# Altium PCB EasyPIC16F1455.PcbDoc
Units mm, origin at the board's own origin, x right, y up, seen from the top; angles counter-clockwise.
Board outline 38.73 x 27.56 mm, 2 copper layers (Top Layer, Bottom Layer); 20 components, 26 nets, 82 pads, 12 vias.
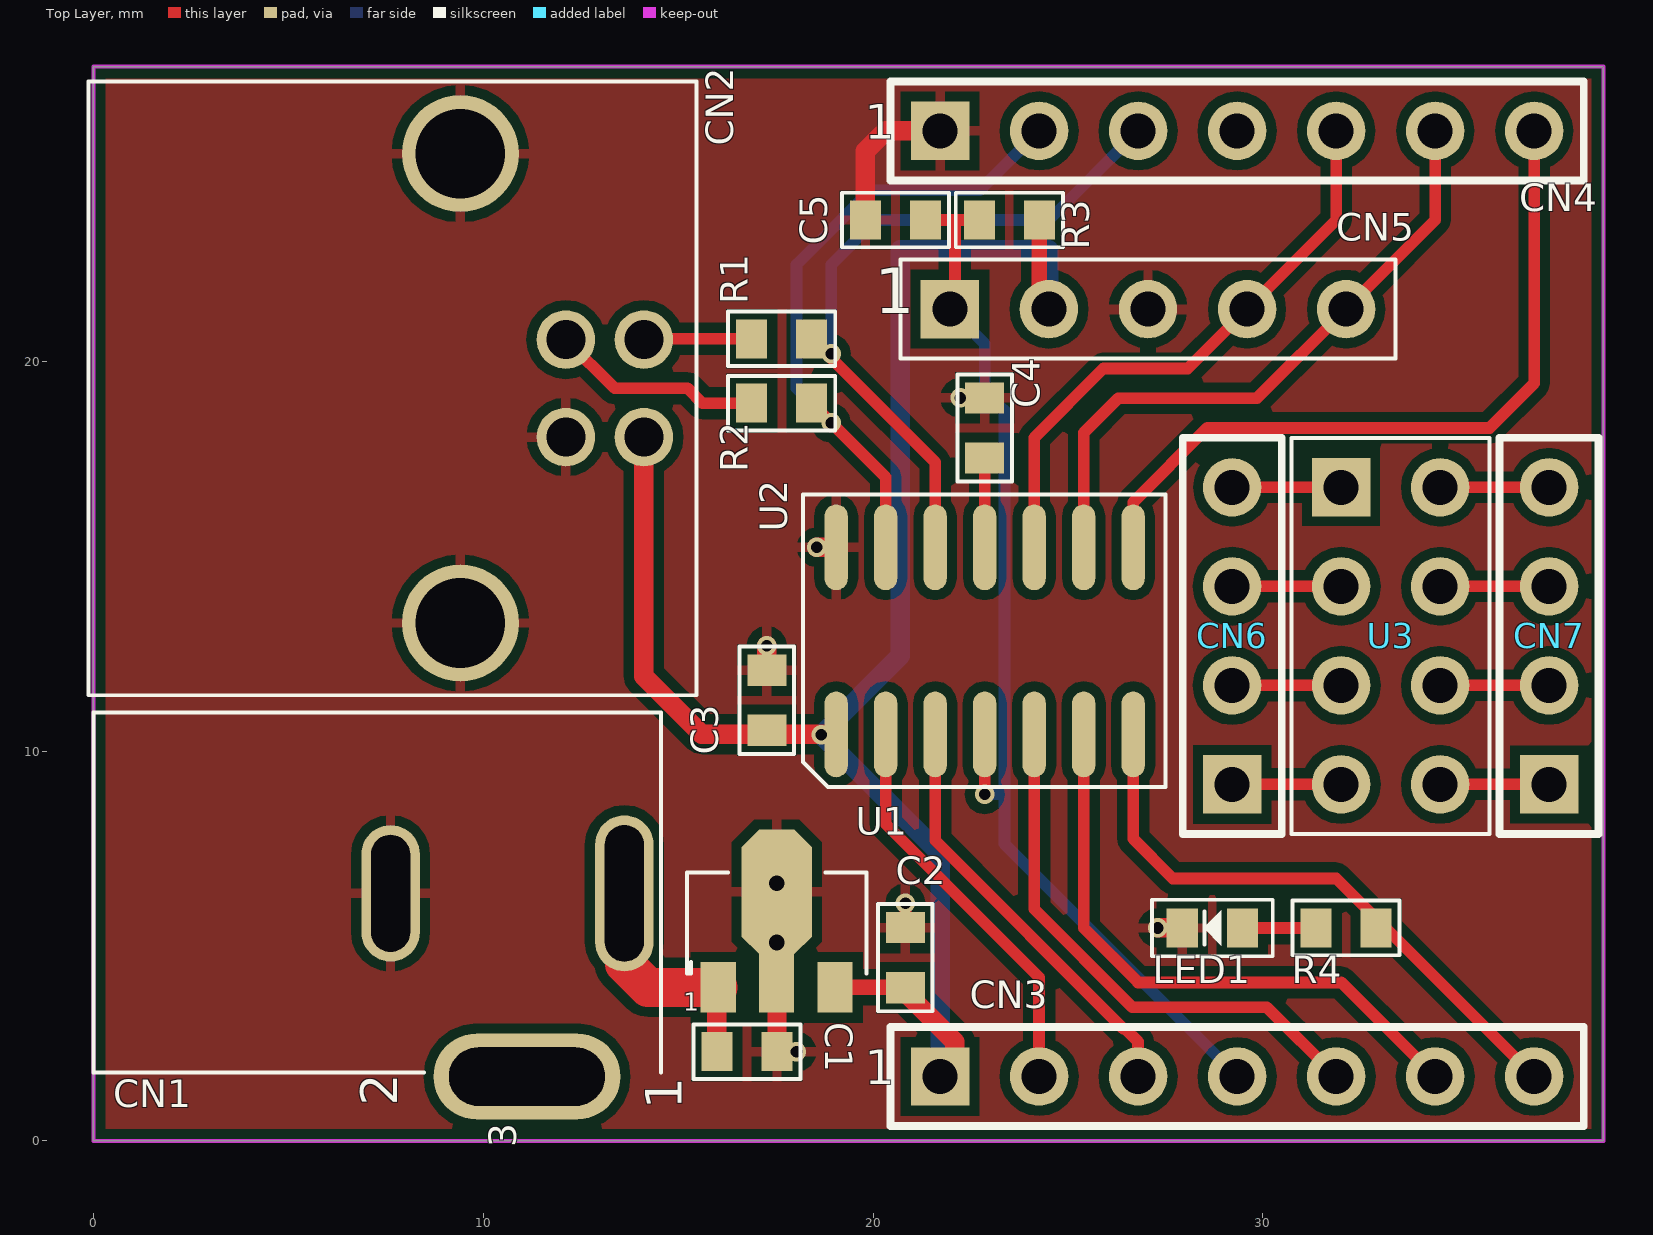
[diagram p0: Top Layer view]
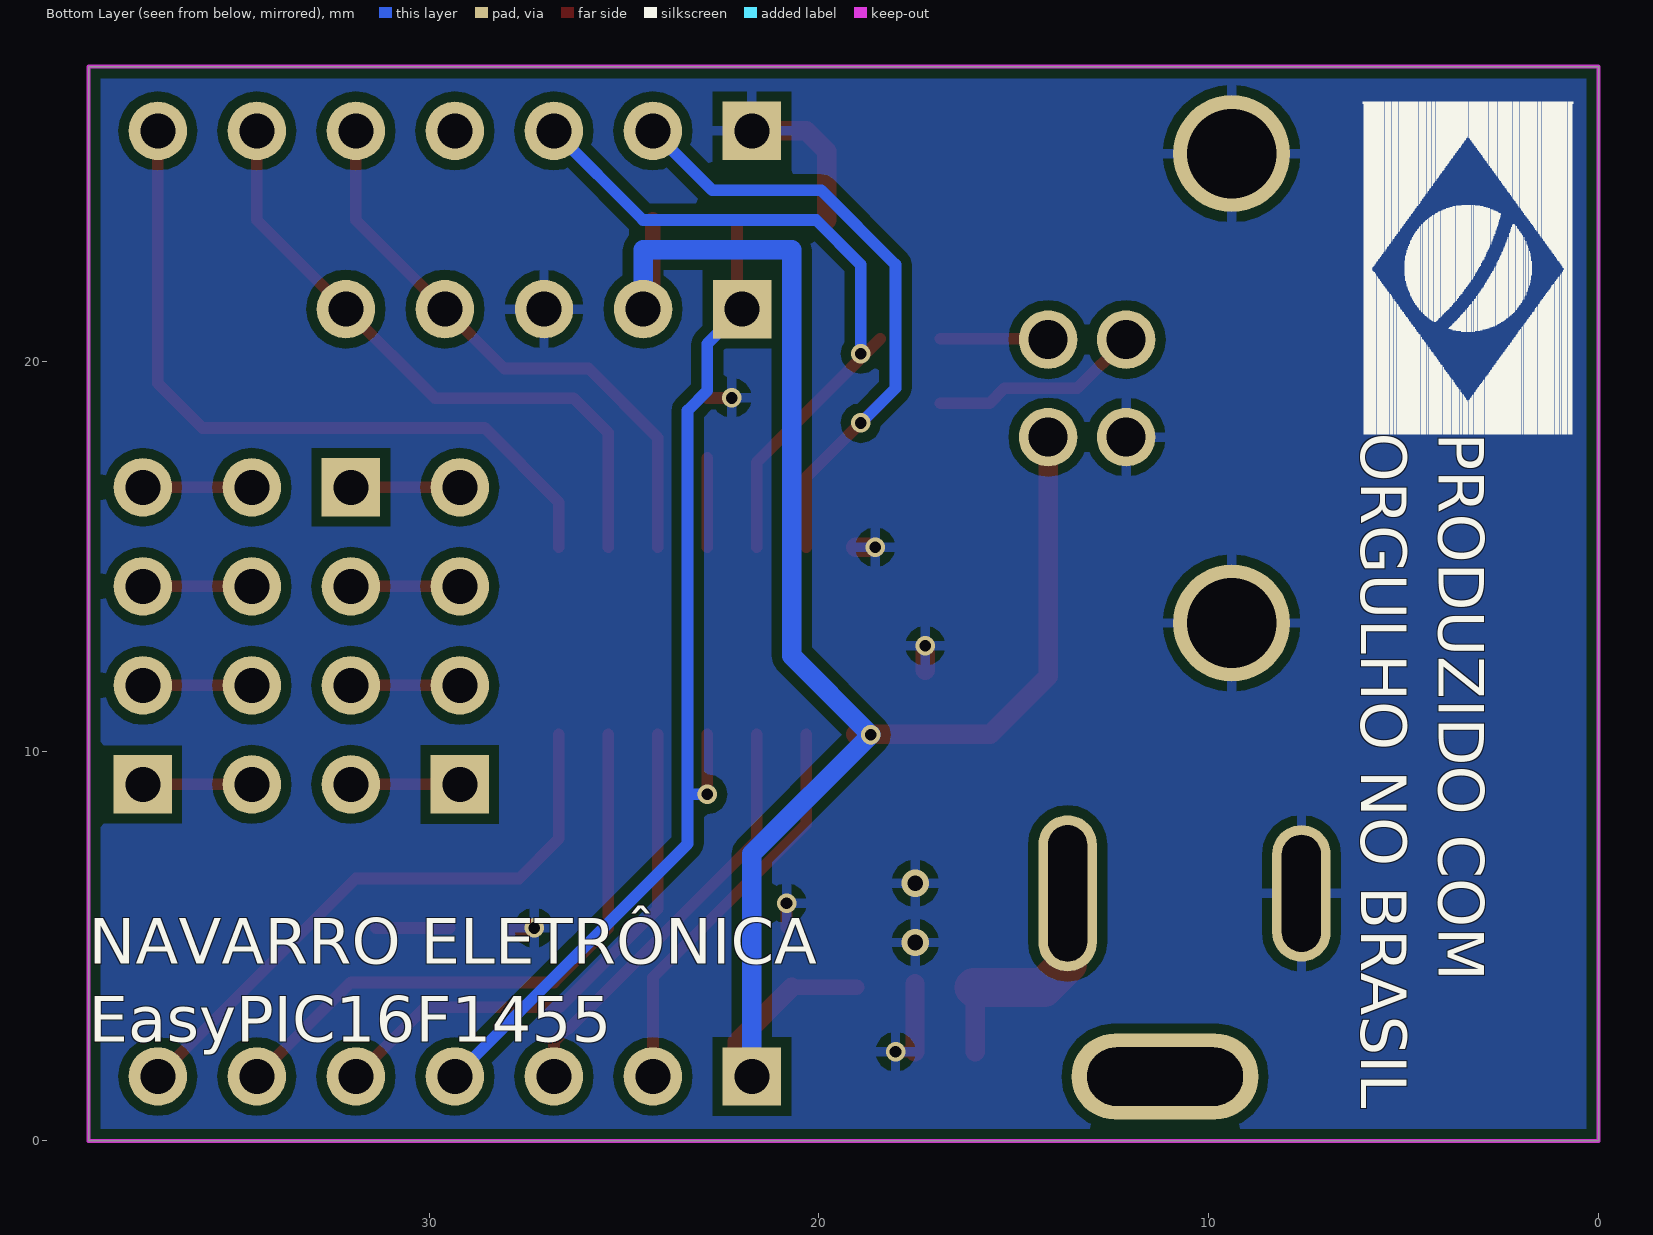
[diagram p1: Bottom Layer view, seen from below]

## Layer stack, top to bottom
Top Solder: solder mask 0.0102, Solder Resist, Dk 3.5
Top Layer: signal copper 0.0356
Dielectric 1: dielectric 0.32, FR-4, Dk 4.8
Bottom Layer: signal copper 0.0356
Bottom Solder: solder mask 0.0102, Solder Resist, Dk 3.5

## Board outline
0,0 0,27.559 38.735,27.559 38.735,0

## Design rules (kind name [scope] priority, off if disabled: settings)
Clearance [All] p1: gap=0.254
PolygonConnect [All] p1: connectstyle=Relief reliefconductorwidth=0.254 reliefentries=4 polygonreliefangle="90 Angle" airgapwidth=0.254
RoomDefinition EasyPIC16F1455 [InComponentClass('EasyPIC16F1455')] p1: confinementstyle=ConfineIn formatcopy=TRUE lockcomponents=FALSE outline -28.702,-32.385 22.098,-32.385 22.098,-6.985 -28.702,-6.985
RoutingVias [All] p1: holewidth=0.711 width=1.27 viastyle="Through Hole" minholewidth=0.711 minwidth=1.27 maxholewidth=0.711 maxwidth=1.27
SolderMaskExpansion [All] p1: expansion=0.102
Width [All] p1: maxlimit=10 minlimit=0.254 preferedwidth=0.254 minimp=50.000000 maximp=50.000000 favimp=50.000000
30 further rules are at their usual default settings.

## Components (designator, comment, footprint, x,y, rotation, side; value= is the part's Value field where it differs from the comment)
C1 "Capacitor Cerâmico" CC0603 16.764,2.286 r180 top
C2 "Capacitor Cerâmico" CC0603 20.828,4.699 r270 top
C3 "Capacitor Cerâmico" CC0603 17.272,11.303 r270 top
C4 "Capacitor Cerâmico" CC0603 22.86,18.288 r270 top
C5 "Capacitor Cerâmico" CC0603 20.574,23.622 r0 top
CN1 "Jack-3Pol" CONN_JACK-FONTE_3N 7.62,6.35 r90 top
CN2 "USB B" CONN_USB-B_RCPT-H 6.985,19.304 r270 top
CN3 "Header 7" "CONN HDR1X7" 21.717,1.651 r0 top
CN4 "Header 7" "CONN HDR1X7" 21.717,25.908 r0 top
CN5 "ICS" "CONN HDR1X5" 21.971,21.336 r0 top
CN6 "Header 4" "CONN HDR1X4" 29.21,9.144 r90 top
CN7 "Header 4" "CONN HDR1X4" 37.338,9.144 r90 top
LED1 "LED" "LED 0603" 28.702,5.461 r180 top
R1 "Resistor" CC0603 17.653,20.574 r180 top
R2 "Resistor" CC0603 17.653,18.923 r180 top
R3 "Resistor" CC0603 23.495,23.622 r0 top
R4 "Resistor" CC0603 32.131,5.461 r180 top
U1 "MC78L05A" SOT-89-3N 17.526,5.588 r90 top
U2 "PIC16F1455" SOIC-14N 22.86,12.827 r90 top
U3 "Rádio Chinês" MOD_NRF24L01 32.004,16.764 r0 top

## Footprints (in the part's own frame and the unit in brackets; to place one, negate y for a bottom-side part, rotate by r counter-clockwise, add the part's x,y. Pads: shape width x height; smd on the part's side, far side on the other; paste and mask are expansions set on the pad)
CC0603 [mm] "Chip Resistor, 2-Leads, Body 1,6x0,8mm, IPC Medium Density"
  rect 0.8x1 smd: 1(-0.77,0) 2(0.77,0)
  silkscreen extent -1.38,-0.7 1.38,0.7, body extent -0.8,-0.42 0.8,0.43, height 0.45
"CONN HDR1X4" [mm] "Connector; Header; 4 Position"
  rect 1.5x1.5 hole 0.9: 1(0,0)
  round 1.5 hole 0.9: 2(2.54,0) 3(5.08,0) 4(7.62,0)
  silkscreen extent -1.27,-1.27 8.89,1.27
"CONN HDR1X5" [mm] "Connector; Header; 5 Position, Pitch 2.54mm"
  rect 1.5x1.5 hole 0.9: 1(0,0)
  round 1.5 hole 0.9: 2(2.54,0) 3(5.08,0) 4(7.62,0) 5(10.16,0)
  silkscreen extent -1.27,-1.27 11.43,1.27, body extent -1.27,-1.27 11.43,1.27, height 8.51
"CONN HDR1X7" [mm] "Connector; Header; 7 Position"
  rect 1.5x1.5 hole 0.9: 1(0,0)
  round 1.5 hole 0.9: 2(2.54,0) 3(5.08,0) 4(7.62,0) 5(10.16,0) 6(12.7,0) 7(15.24,0)
  silkscreen extent -1.27,-1.27 16.51,1.27, body extent -1.27,-1.27 16.51,1.27, height 8.51
CONN_JACK-FONTE_3N [mm]
  oval 4x1.5 hole 1 slot 3.5 at 0 deg: 1(0,-6)
  oval 3.5x1.5 hole 1 slot 3 at 0 deg: 2(0,0)
  oval 2.2x4.8 hole 1.5 slot 4 at 90 deg: 3(-4.7,-3.5)
  silkscreen extent -4.59,-6.94 4.64,7.62, body extent -4.5,-6 4.5,7.73, height 11
CONN_USB-B_RCPT-H [mm] "Conector USB SMD tipo B, Macho"
  round 1.5 hole 1: 1(1.25,7.135) 2(-1.25,7.135) 3(-1.25,5.135) 4(1.25,5.135)
  round 3 hole 2.3: 5(6.02,2.425) 6(-6.02,2.425)
  silkscreen extent -7.87,-7.11 7.87,8.49, body extent -7.45,-7.96 7.35,8.54, height 11
"LED 0603" [mm] "Chip Diode, 2-Leads, Body 1,6x0,8mm, IPC Medium Density"
  rect 0.8x1 smd: 1(-0.77,0) 2(0.77,0)
  silkscreen extent -1.55,-0.73 1.55,0.73, body extent -0.82,-0.43 0.82,0.43, height 0.8
MOD_NRF24L01 [mm] "Radio Chines"
  rect 1.5x1.5 hole 0.9: 1(0,0)
  round 1.5 hole 0.9: 2(2.54,0) 3(0,-2.54) 4(2.54,-2.54) 5(0,-5.08) 6(2.54,-5.08) 7(0,-7.62) 8(2.54,-7.62)
  silkscreen extent -1.27,-8.89 3.81,1.27, body extent -1.77,-13.55 27.23,1.45, height 15.5
SOIC-14N [mm] "SOIC, 14-Leads, Body 8.7x3.9mm, Pitch 1.27mm, IPC Medium Density"
  oval 2.2x0.6 smd: 1(-2.4,3.81) 2(-2.4,2.54) 3(-2.4,1.27) 4(-2.4,0) 5(-2.4,-1.27) 6(-2.4,-2.54) 7(-2.4,-3.81) 8(2.4,-3.81) 9(2.4,-2.54) 10(2.4,-1.27) 11(2.4,0) 12(2.4,1.27) 13(2.4,2.54) 14(2.4,3.81)
  silkscreen extent -3.75,-4.64 3.75,4.65, body extent -2.9,-4.28 2.9,4.27, height 1.75
SOT-89-3N [mm] "SOT89, 3-Leads, Body 4,5x2,4mm (max), Pitch 1,50mm, Lead Span 4,1mm, IPC High Density"
  rect 1.3x0.9 smd: 1(-1.65,1.5) 3(-1.65,-1.5)
  rect 1.5x0.9 smd: 2(-1.55,0)
  oct 3.2x1.8 smd: 2(0.8,0)
  silkscreen extent -1.3,-2.3 1.3,2.3, body extent -2.18,-2.25 1.75,2.25, height 1.4

## Part data
C1 C2 C3 C5: library part "Cap 100nF 50V 0603 X7R", "Capacitor (Semiconductor SIM Model)"
C4: library part "Cap 1uF 50V 0603 X5R", "Capacitor (Semiconductor SIM Model)"
CN1: "Jack Socket, Thru-Hole, Vertical, 2 Conductors, 3 Contacts Single Switch, Normally Closed"
CN2: library part "USB B RCPT-H", "Conector Jack USB B, Through Hole, Right Angle, Horizontal"
CN3 CN4: "Header, 7-Pin"
CN5: library part "Header 5 ICS", "Header, 5-Pin"
CN6 CN7: "Header, 4-Pin"
R1 R2: library part "Res 33R 1% 0603 1/10W"
R3: library part "Res 10K 1% 0603 1/10W"
R4: library part "Res 1K 1% 0603 1/10W"
U1: library part MC78L05, "Regulador Linear 5V"
U2: "Microcontrolador PIC"
U3: library part "Modulo RF NRF24L01", "Módulo de rádio com nRF24L01"

## Via types
v1: diameter 0.5, hole 0.3, Top Layer to Bottom Layer, tented both sides, 10 vias
v2: diameter 0.7, hole 0.4, Top Layer to Bottom Layer, tented both sides, 2 vias

## Nets (pads, with @x,y where several pads share a name; then routed paths per layer and width w, separated by ;. In a path a pad name is that pad's centre, name@x,y a point inside that pad or via, vN(x,y) a via of type N, cw(c..) or ccw(c..) an arc to the next point about the centre after c; other vN are vias at no path point)
5V: C2.2 C3.2 CN2.1 CN3.1 CN5.2 R3.2 U1.3 U2.1 | length 47.4
  Top Layer w0.4: U1.3 C2.2@20.7,3.938 ; R3.2 24.265,21.582 CN5.2
  Top Layer w0.5: CN2.1 14.12,11.915 15.608,10.427 U2.1 ; C2.2@20.7,3.938 22.098,2.54 22.098,2.032 CN3.1
  Bottom Layer w0.5: CN3.1 21.717,7.366 v1(18.669,10.414) 20.701,12.446 20.701,22.86 24.511,22.86 CN5.2
12V: C1.2 CN1.1 U1.1 | length 6.1
  Top Layer w0.5: C1.2 U1.1@15.994,3.906
  Top Layer w1: CN1.1 13.62,4.541 14.223,3.938 U1.1
D+: CN4.2 R2.1 U2.13 | length 16.6
  Top Layer w0.3: R2.1 20.32,17.026 U2.13
  Bottom Layer w0.3: v1(18.923,18.415) 18.034,19.304 18.034,22.479 19.939,24.384 22.733,24.384 CN4.2
D-: CN4.3 R1.1 U2.12 | length 18.2
  Top Layer w0.3: R1.1 21.59,17.407 U2.12
  Bottom Layer w0.3: v1(18.923,20.193) 18.923,22.479 20.066,23.622 24.511,23.622 CN4.3
GND: C1.1 C2.1 C3.1 C4.1 C5.1 CN1.2 CN2.4 CN2.5 CN2.6 CN4.1 CN5.3 LED1.2 U1.2 U2.14 | length 9.1
  Top Layer w0.3: C1.1 v1(18.034,2.286) ; C2.1 v1(20.828,6.096) ; v1(22.233,19.058) C4.1
  Top Layer w0.5: C3.1 v1(17.272,12.7) ; C1.1 U1.2@17.534,4.03 ; v1(18.555,15.227) U2.14 ; C5.1 19.804,25.392 20.32,25.908 CN4.1 ; v1(27.305,5.461) LED1.2
  other v2: 17.526,5.088 17.526,6.608
MCLR: C5.2 CN3.4 CN5.1 R3.1 U2.4 | length 28.3
  Top Layer w0.3: C5.2 22.098,23.622 ; CN5.1@22.098,21.463 22.098,23.622 ; R3.1 22.098,23.622 ; v1(22.86,8.89) U2.4
  Bottom Layer w0.3: CN5.1 22.86,20.447 22.86,19.244 23.368,18.736 23.368,7.62 CN3.4 ; v1(22.86,8.89) 23.368,8.89
NetCN2_2: CN2.2 R1.2 | length 2.7
  Top Layer w0.3: CN2.2@14.14,20.574 R1.2
NetCN2_3: CN2.3 R2.2 | length 5.4
  Top Layer w0.3: CN2.3 13.37,19.304 15.24,19.304 15.621,18.923 R2.2
NetCN3_2: CN3.2 U2.2 | length 10.4
  Top Layer w0.3: U2.2 20.32,8.128 24.257,4.191 CN3.2
NetCN3_3: CN3.3 U2.3 | length 11
  Top Layer w0.3: U2.3 21.59,7.704 26.419,2.875 26.462,2.875 26.797,2.54 CN3.3
NetCN3_5: CN3.5 U2.5 | length 14
  Top Layer w0.3: U2.5 24.13,5.948 26.649,3.429 30.099,3.429 CN3.5
NetCN3_6: CN3.6 U2.6 | length 15.6
  Top Layer w0.3: U2.6 25.4,5.461 26.797,4.064 32.004,4.064 CN3.6
NetCN3_7: CN3.7 R4.1 U2.7 | length 15.5
  Top Layer w0.3: U2.7 26.67,7.747 27.686,6.731 31.877,6.731 CN3.7
NetCN4_7: CN4.7 U2.8 | length 19.2
  Top Layer w0.3: U2.8 26.67,16.383 28.575,18.288 35.814,18.288 36.957,19.431 CN4.7
NetCN6_1: CN6.1 U3.7 | length 2.8
  Top Layer w0.3: CN6.1 U3.7
NetCN6_2: CN6.2 U3.5 | length 2.8
  Top Layer w0.3: CN6.2 U3.5
NetCN6_3: CN6.3 U3.3 | length 2.8
  Top Layer w0.3: CN6.3 U3.3
NetCN6_4: CN6.4 U3.1 | length 2.8
  Top Layer w0.3: CN6.4 U3.1
NetCN7_1: CN7.1 U3.8 | length 2.8
  Top Layer w0.3: U3.8 CN7.1
NetCN7_2: CN7.2 U3.6 | length 2.8
  Top Layer w0.3: U3.6 CN7.2
NetCN7_3: CN7.3 U3.4 | length 2.8
  Top Layer w0.3: U3.4 CN7.3
NetCN7_4: CN7.4 U3.2 | length 2.8
  Top Layer w0.3: U3.2 CN7.4
NetLED1_1: LED1.1 R4.2 | length 1.9
  Top Layer w0.3: LED1.1 R4.2
PGC: CN4.6 CN5.5 U2.9 | length 16.5
  Top Layer w0.3: U2.9 25.4,18.161 26.289,19.05 29.845,19.05 CN5.5 34.417,23.622 CN4.6
PGD: CN4.5 CN5.4 U2.10 | length 15.2
  Top Layer w0.3: U2.10 24.13,18.034 25.908,19.812 28.067,19.812 CN5.4 31.877,23.622 CN4.5
VUSB: C4.2 U2.11 | length 2.3
  Top Layer w0.3: U2.11 C4.2
pads on no net: CN1.3 CN4.4

## Polygon pours and split planes (outlines as drawn)
GND on Bottom Layer "GND_L02_P000" (solid, pour order 0): 0,27.559 38.735,27.559 38.735,0 0,0
GND on Top Layer "GND_L01_P002" (solid, pour order 2): 0,27.559 38.735,27.559 38.735,0 0,0

## Keep-outs
Keep-Out Layer:
  the board outline again, w0.1

## Silkscreen, mask and mechanical layers (free items; w line width, h text height)
Bottom Overlay:
  drawing of 846 lines, arcs and shapes, not listed
  text "PRODUZIDO COM / ORGULHO NO BRASIL" at 6.477,18.161 h2 r90
  text "NAVARRO ELETRÔNICA / EasyPIC16F1455" at 38.735,2.159 h2

## Text inside footprints (layer, text, board x,y; h text height)
CN1: Top Overlay "1" at 15.403,0.806 h1.6 r90; Top Overlay "2" at 8.104,0.905 h1.6 r90; Top Overlay "3" at 11.07,-0.161 h1.2 r90
CN3: Top Overlay "1" at 19.782,1.155 h1.5
CN4: Top Overlay "1" at 19.782,25.412 h1.5
CN5: Top Overlay "1" at 20.036,20.84 h2
U1: Top Overlay "1" at 15.126,3.188 h0.8